# EAGLE board Connector v33 (EAGLE 9.7.0)
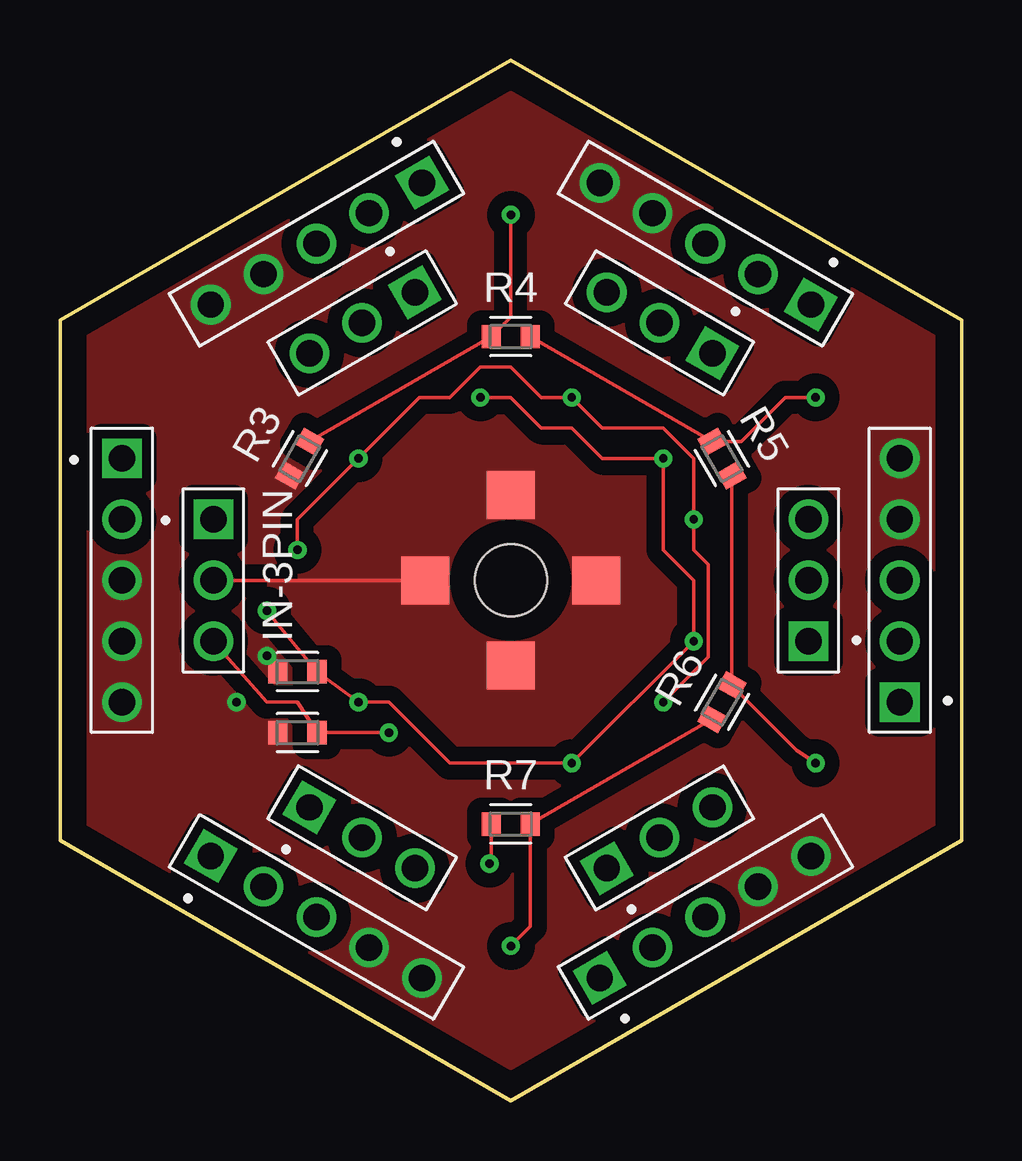
[diagram p0: board, top side]
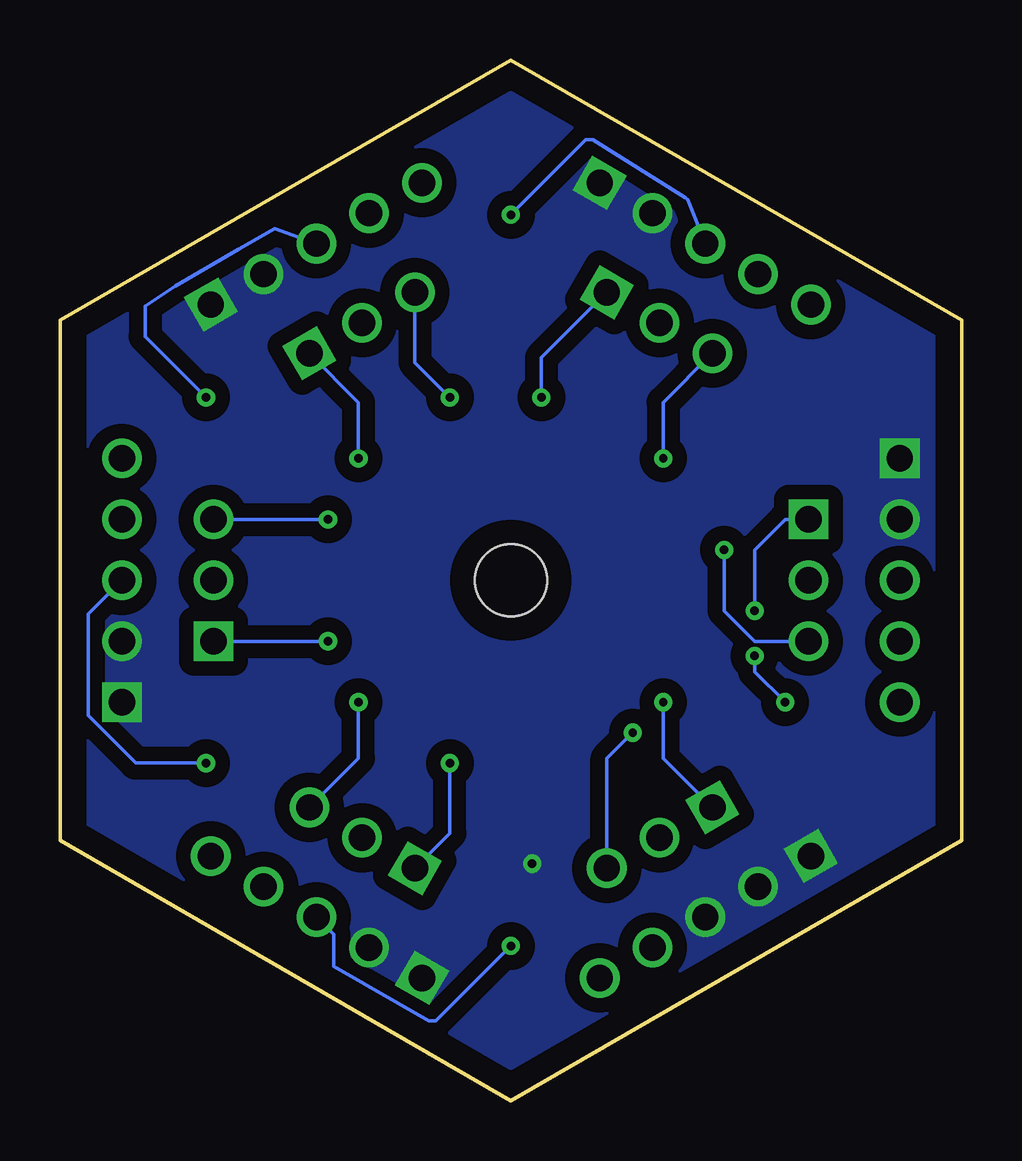
[diagram p1: board, bottom side, seen from below]

Size 37.57 x 43.38 mm. Coordinates in mm from the lower left corner, seen from the top.
Outline: 18.78,43.38 0,32.54 0,10.85 18.78,0 37.57,10.85 37.57,32.54 18.78,43.38
Copper layers (1*16): Top 0.035mm / dielectric 1.5mm / Bottom 0.035mm
Design rules "default": minimum track width 6mil, minimum drill 0.35mm, track to track 6mil, track to pad 6mil, pad to pad 6mil, via to via 6mil, smd to smd 6mil, copper to edge 40mil, drill to drill 6mil, minimum pad ring 10mil, minimum via ring 8mil, stop-mask expansion 4mil, vias tented up to drill 0mil, thermal gap 10mil
Holes 3 mm at 18.78,21.69

## Footprints (pad centres in the part's own frame; a part is rotated, then mirrored left to right if it is on the bottom)
61300311121 = drill 1.1 square: 1 -2.54,0 | drill 1.1: 2 0,0; 3 2.54,0
61300511121 = drill 1.1 square: 1 -5.08,0 | drill 1.1: 2 -2.54,0; 3 0,0; 4 2.54,0; 5 5.08,0
RESC1608X60 = smd 0.799 x 0.974: 1 -0.815,0; 2 0.815,0
TP20SQ = smd 2 x 2: TP 0,0

## Placement (x,y rotation side)
IN-3PIN  61300311121  [61300311121]  6.39,21.69 270 top
IN-5PIN  61300511121  [61300511121]  2.58,21.69 270 top
OUT-1-3PIN  61300311121  [61300311121]  12.59,32.42 210 top
OUT-1-5PIN  61300511121  [61300511121]  10.68,35.72 210 top
OUT-2-3PIN  61300311121  [61300311121]  24.98,32.42 150 top
OUT-2-5PIN  61300511121  [61300511121]  26.89,35.72 150 top
OUT-3-3PIN  61300311121  [61300311121]  31.18,21.69 90 top
OUT-3-5PIN  61300511121  [61300511121]  34.99,21.69 90 top
OUT-4-3PIN  61300311121  [61300311121]  24.98,10.96 30 top
OUT-4-5PIN  61300511121  [61300511121]  26.89,7.66 30 top
OUT-5-3PIN  61300311121  [61300311121]  12.59,10.96 330 top
OUT-5-5PIN  61300511121  [61300511121]  10.68,7.66 330 top
R1  4.7K  [RESC1608X60]  9.89,17.88 0 top
R2  4.7K  [RESC1608X60]  9.89,15.34 0 top
R3  1K  [RESC1608X60]  9.99,26.77 60 top
R4  1K  [RESC1608X60]  18.78,31.85 0 top
R5  1K  [RESC1608X60]  27.58,26.77 300 top
R6  1K  [RESC1608X60]  27.58,16.61 60 top
R7  1K  [RESC1608X60]  18.78,11.53 0 top
TP1  TPSQTP20SQ  [TP20SQ]  15.23,21.69 0 top
TP2  TPSQTP20SQ  [TP20SQ]  18.78,18.13 0 top
TP3  TPSQTP20SQ  [TP20SQ]  22.34,21.69 0 top
TP4  TPSQTP20SQ  [TP20SQ]  18.78,25.25 0 top

## Library data of the parts
IN-3PIN OUT-1-3PIN OUT-2-3PIN OUT-3-3PIN OUT-4-3PIN OUT-5-3PIN = Headers; CREATED_BY: PCBLayout.com; DIGI_KEY_PART_NUMBER: 732-5316-ND; MANUFACTURER: Wurth Electronics Inc.; MPN: 61300311121
IN-5PIN OUT-1-5PIN OUT-2-5PIN OUT-3-5PIN OUT-4-5PIN OUT-5-5PIN = Headers; CREATED_BY: PCBLayout.com; DIGI_KEY_PART_NUMBER: 732-5318-ND; MANUFACTURER: Wurth Electronics Inc.; MPN: 61300511121
R1-R7 = Resistor; CATEGORY: Resistor; SUB-CATEGORY: Fixed
TP1-TP4 = testpad

## Nets
1V: OUT-4-5PIN.3 R6.1 R7.2
2V: OUT-3-5PIN.3 R5.2 R6.2
3V: OUT-2-5PIN.3 R4.2 R5.1
4V: OUT-1-5PIN.3 R3.2 R4.1
5V: IN-5PIN.3 IN-5PIN.4 IN-5PIN.5 OUT-1-5PIN.4 OUT-1-5PIN.5 OUT-2-5PIN.4 OUT-2-5PIN.5 OUT-3-5PIN.4 OUT-3-5PIN.5 OUT-4-5PIN.4 OUT-4-5PIN.5 OUT-5-5PIN.4 OUT-5-5PIN.5 R1.1 R2.1 R3.1
CAPACITIVE: IN-3PIN.2 TP1.TP TP2.TP TP3.TP TP4.TP
GND: IN-5PIN.1 IN-5PIN.2 OUT-1-5PIN.1 OUT-1-5PIN.2 OUT-2-5PIN.1 OUT-2-5PIN.2 OUT-3-5PIN.1 OUT-3-5PIN.2 OUT-4-5PIN.1 OUT-4-5PIN.2 OUT-5-5PIN.1 OUT-5-5PIN.2 OUT-5-5PIN.3 R7.1
SCL: IN-3PIN.1 OUT-1-3PIN.1 OUT-2-3PIN.1 OUT-3-3PIN.1 OUT-4-3PIN.1 OUT-5-3PIN.1 R1.2
SDA: IN-3PIN.3 OUT-1-3PIN.3 OUT-2-3PIN.3 OUT-3-3PIN.3 OUT-4-3PIN.3 OUT-5-3PIN.3 R2.2

## Tracks (layer width: path | path; a pad name or v marks a point on that pad's centre or on a via)
1V  (via drill 0.35)
  Top 0.152: R6.1 R7.2 19.6,7.27 v18.78,6.45
  Bottom 0.152: v18.78,6.45 21.91,3.32 22.2,3.32 26.16,5.61 26.16,6.93 OUT-4-5PIN.3
2V  (via drill 0.35)
  Top 0.152: v31.48,14.07 30.71,14.6 R6.2 R5.2
  Bottom 0.152: v31.48,14.07 34.42,14.07 36.4,16.05 36.4,20.28 OUT-3-5PIN.3
3V  (via drill 0.35)
  Top 0.152: R4.2 R5.1 28.38,27.48 30.21,29.31 v31.48,29.31
  Bottom 0.152: v31.48,29.31 34.02,31.85 34.02,33.12 32.76,33.96 30.12,35.49 | 30.12,35.49 | 30.12,35.49 28.61,36.36 OUT-2-5PIN.3
4V  (via drill 0.35)
  Top 0.152: v18.78,36.93 18.78,32.67 R4.1 R3.2
  Bottom 0.152: v18.78,36.93 15.66,40.06 15.37,40.06 11.52,37.63 11.42,37.57 OUT-1-5PIN.3
5V  (via drill 0.35)
  Top 0.152: R1.1 8.62,18.34 v8.62,18.54
  Bottom 0.152: v7.35,16.61 8.62,17.88 v8.62,18.54
  pour Top (isolate 0.61, no thermals): -7.82,6.51 20.05,-3.63 42.84,9.04 42.84,43.21 -12.88,45.74
CAPACITIVE
  Top 0.152: IN-3PIN.2 TP1.TP
  pour Top (isolate 0.61, no thermals): 9.97,19.17 9.97,16.69 13.72,16.69 13.75,16.68 16.28,14.15 25.1,14.15 27.6,16.64 27.6,25.42 26.39,25.42 26.36,25.44 21.29,30.5 16.28,30.5 9.97,24.2 9.97,21.68 9.96,21.65 9.94,21.63 9.91,21.61 8.7,21.61 8.7,20.45 9.96,19.19
GND  (via drill 0.35)
  Top 0.152: R7.1 17.97,9.9 v17.9,9.88
  Bottom 1.27: 10.75,7.72 OUT-5-5PIN.3
  pour Bottom (isolate 0.61, no thermals): -1.47,-2.36 46.65,-2.36 46.65,43.2 -6.53,43.2
SCL  (via drill 0.35)
  Top 0.152: v8.62,20.42 R1.2 v12.43,16.61 13.7,16.61 16.24,14.07 v21.32,14.07 v26.4,19.15 26.4,21.69 25.13,22.96 v25.13,26.77 22.59,26.77 21.32,28.04 20.05,28.04 18.78,29.31 v17.51,29.31
  Bottom 0.152: OUT-1-3PIN.1 17.51,30.97 v17.51,29.31 | OUT-2-3PIN.1 25.13,29.11 v25.13,26.77 | OUT-3-3PIN.1 v26.4,19.15 | OUT-4-3PIN.1 21.32,11.14 v21.32,14.07 | OUT-5-3PIN.1 12.43,14.27 v12.43,16.61 | v8.62,20.42 8.62,22.96 7.35,24.23 IN-3PIN.1
SDA  (via drill 0.35)
  Top 0.152: v13.7,15.34 R2.2 9.89,16.61 8.62,16.61 IN-3PIN.3 | v9.89,22.96 9.89,24.23 v12.43,26.77 14.97,29.31 16.24,29.31 17.51,30.58 18.78,30.58 20.05,29.31 v21.32,29.31 22.59,28.04 25.13,28.04 26.4,26.77 v26.4,24.23 26.4,22.96 27.01,22.35 27.01,18.49 v25.13,16.61
  Bottom 0.152: OUT-1-3PIN.3 12.43,29.11 v12.43,26.77 | OUT-2-3PIN.3 22.78,30.77 v21.32,29.31 | OUT-3-3PIN.3 v26.4,24.23 | OUT-4-3PIN.3 25.13,14.27 v25.13,16.61 | OUT-5-3PIN.3 14.79,14.26 v13.7,15.34 | IN-3PIN.3 8.62,19.15 9.89,20.42 v9.89,22.96